# Altium PCB qav90.PcbDoc (part 5 of 7)
Units mm, origin at the board's own origin, x right, y up, seen from the top; angles counter-clockwise.
Board outline 90 x 90 mm, 3 copper layers (Top Layer, Mid-Layer 1, Bottom Layer); 214 components, 77 nets, 727 pads, 256 vias.
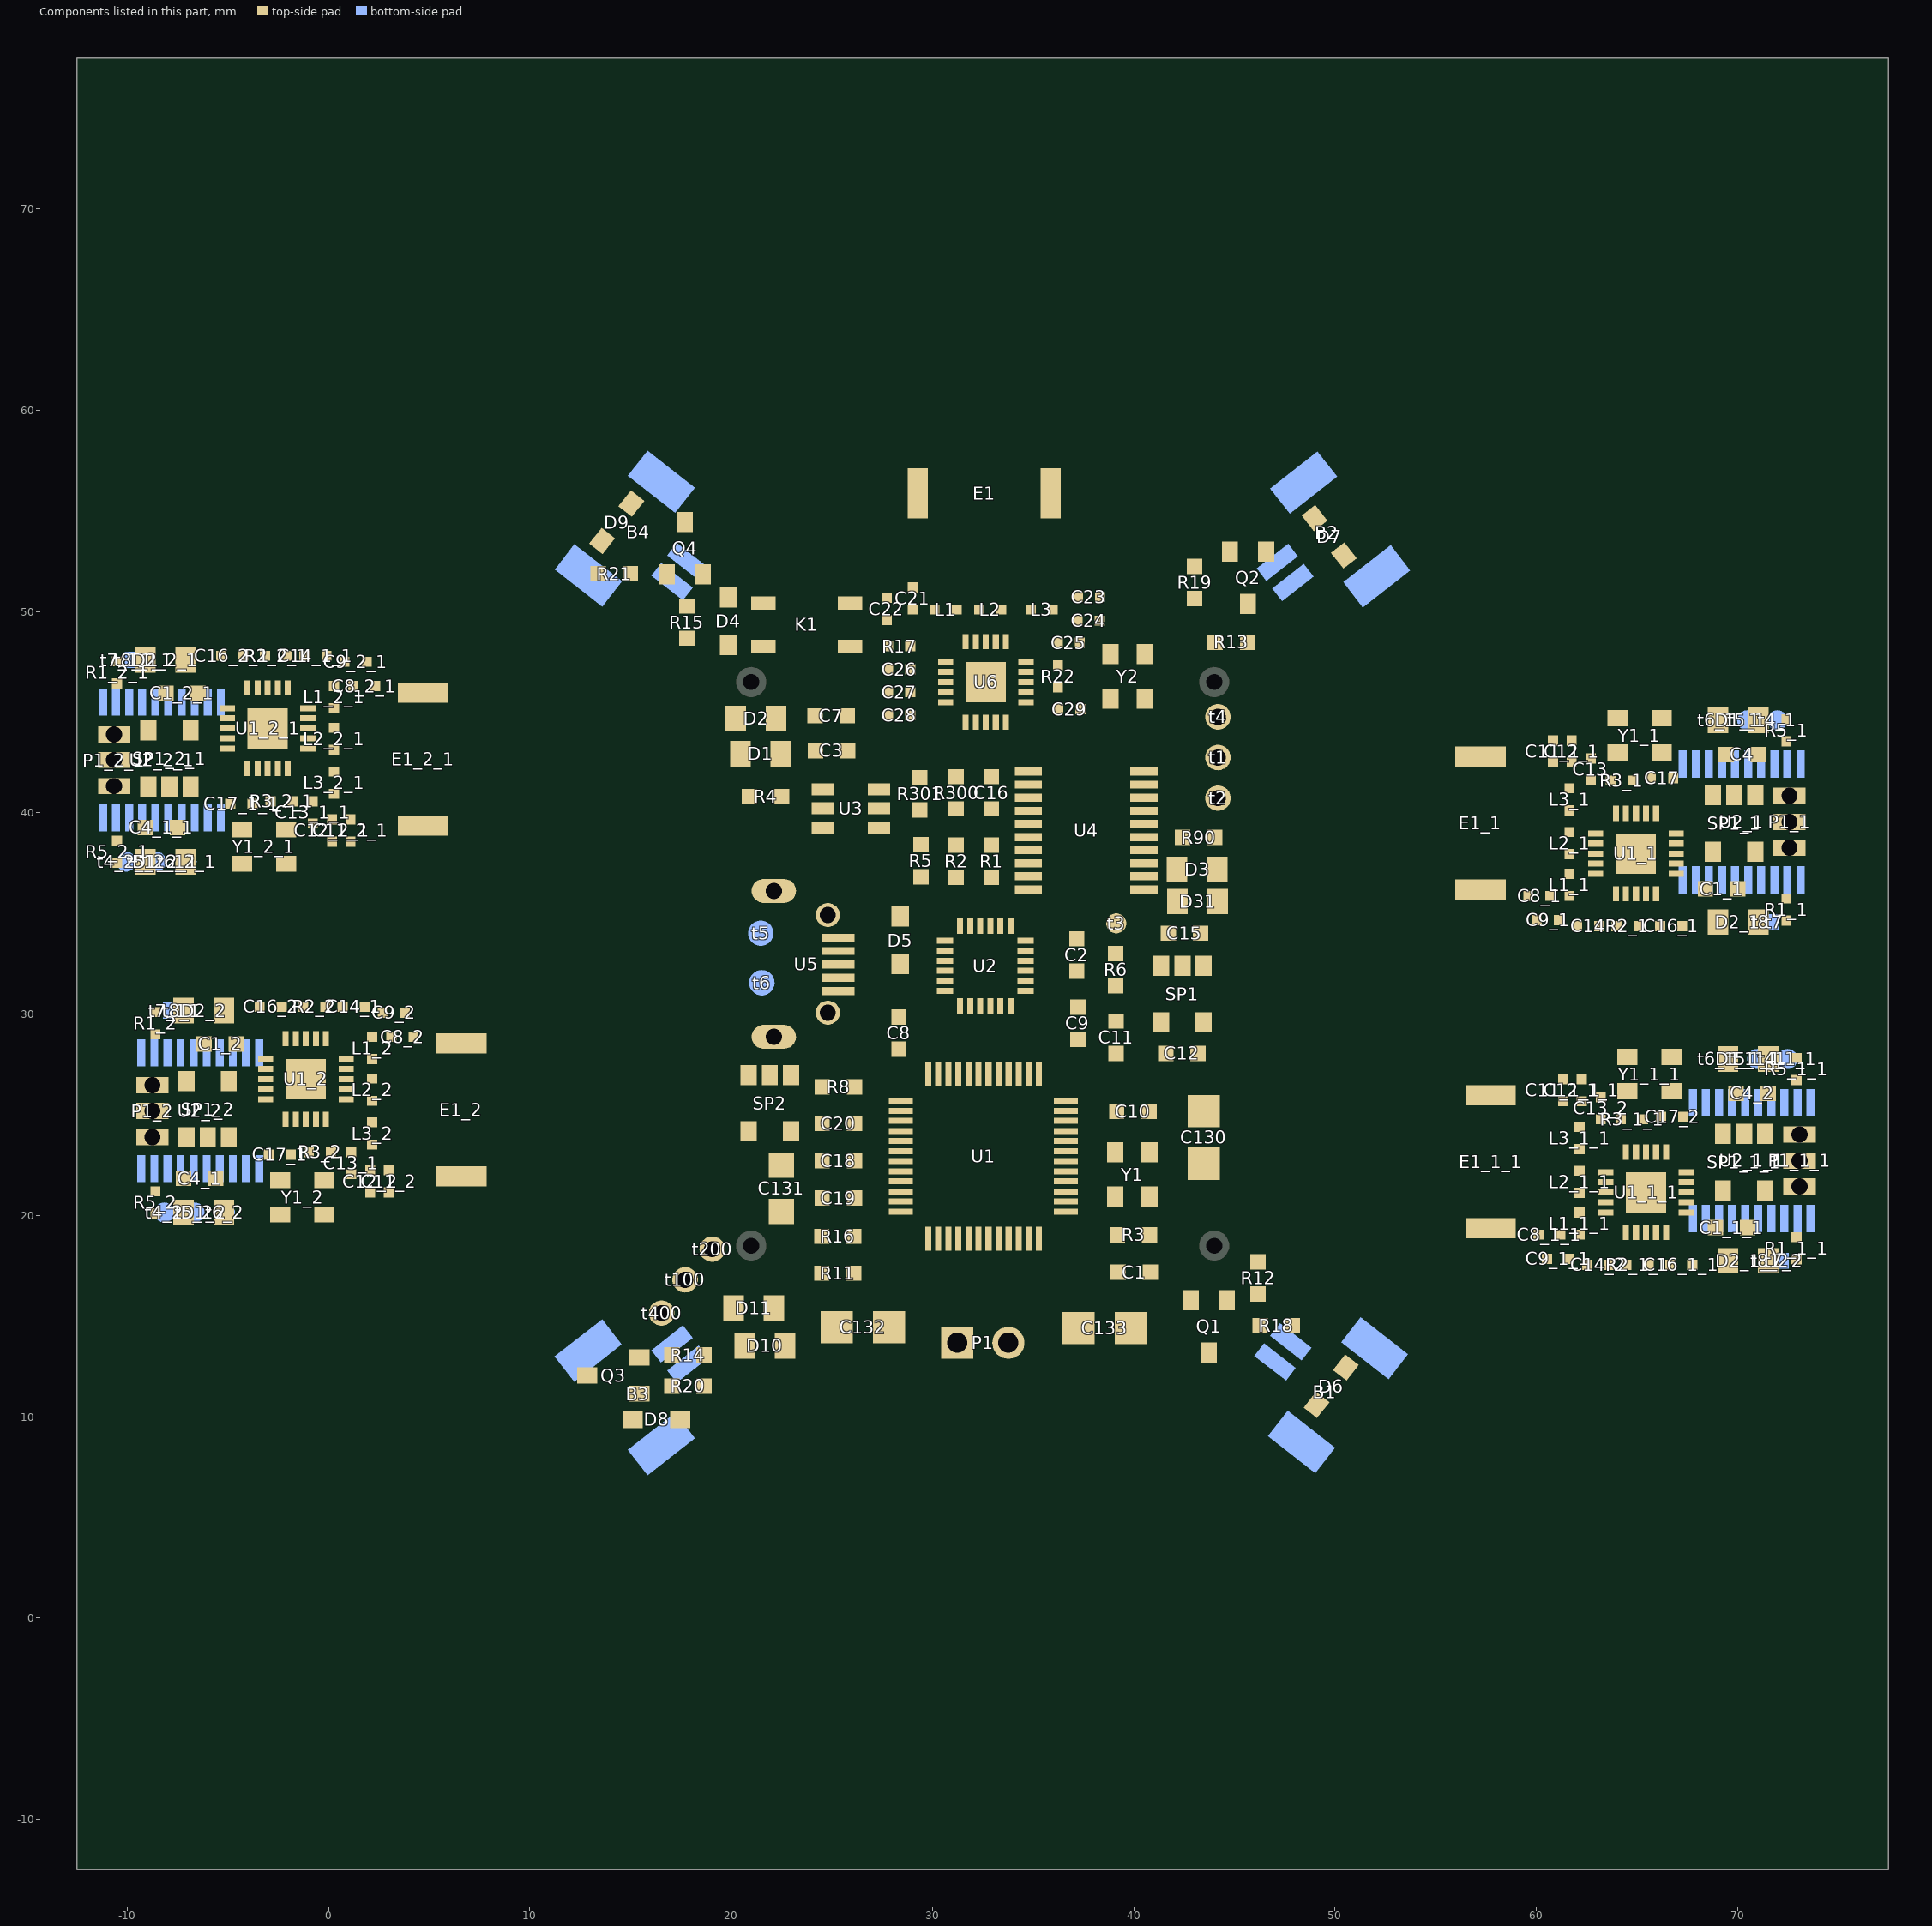
[diagram p5: the components of this part, seen from the top]

## Via types
v1: diameter 0.55, hole 0.25, Top Layer to Bottom Layer, tented both sides, 248 vias
v2: diameter 0.55, hole 0.25, Top Layer to Bottom Layer, 8 vias

## Nets (pads, with @x,y where several pads share a name; then routed paths per layer and width w, separated by ;. In a path a pad name is that pad's centre, name@x,y a point inside that pad or via, vN(x,y) a via of type N, cw(c..) or ccw(c..) an arc to the next point about the centre after c; other vN are vias at no path point) (continued)
copper on no net: (continued)
  Top Layer w0.254: 63.793,41.693 cw(c63.413,41.313) 63.95,41.313 ; 63.793,41.693 cw(c63.413,41.313) 63.95,41.313 ; 63.793,41.693 cw(c63.413,41.313) 63.95,41.313 ; 63.818,41.564 ccw(c64.434,41.378) 63.876,41.057 ; 63.818,41.564 ccw(c64.434,41.378) 63.876,41.057 ; 63.818,41.564 ccw(c64.434,41.378) 63.876,41.057 ; 63.903,24.775 cw(c63.903,24.478) 64.113,24.688 ; 63.903,24.775 ccw(c63.903,25.072) 64.113,24.862 ; 63.903,24.775 cw(c63.903,24.478) 64.113,24.688 ; 63.903,24.775 ccw(c63.903,25.072) 64.113,24.862 ; 63.903,24.775 cw(c63.903,24.478) 64.113,24.688 ; 63.903,24.775 ccw(c63.903,25.072) 64.113,24.862 ; 63.912,42.986 cw(c63.691,42.736) 63.98,42.568 ; 63.912,42.986 cw(c63.691,42.736) 63.98,42.568 ; 63.912,42.986 cw(c63.691,42.736) 63.98,42.568 ; 63.95,34.732 ccw(c64.332,34.732) 64.062,34.462 ; 63.95,34.732 ccw(c64.332,34.732) 64.062,34.462 ; 63.95,34.732 ccw(c64.332,34.732) 64.062,34.462 ; 64.093,37.475 ccw(c64.093,37.832) v1@64.345,37.58 ; 64.093,37.475 cw(c64.093,37.118) v1@64.345,37.37 ; 64.093,37.475 ccw(c64.093,37.832) v1@64.345,37.58 ; 64.093,37.475 cw(c64.093,37.118) v1@64.345,37.37 ; 64.093,37.475 ccw(c64.093,37.832) v1@64.345,37.58 ; 64.093,37.475 cw(c64.093,37.118) v1@64.345,37.37 ; 64.113,24.688 cw(c63.299,23.874) 64.45,23.874 ; 64.113,24.688 cw(c63.299,23.874) 64.45,23.874 ; 64.113,24.688 cw(c63.299,23.874) 64.45,23.874 ; 64.113,24.862 ccw(c63.903,25.072) 64.2,25.072 ; 64.113,24.862 ccw(c63.903,25.072) 64.2,25.072 ; 64.113,24.862 ccw(c63.903,25.072) 64.2,25.072 ; 64.2,24.973 cw(c65.627,24.973) 64.618,25.982 ; 64.2,24.973 cw(c65.627,24.973) 64.618,25.982 ; 64.2,24.973 cw(c65.627,24.973) 64.618,25.982 ; 64.2,25.072 ccw(c64.497,25.072) 64.287,24.862 ; 64.2,25.072 ccw(c64.497,25.072) 64.287,24.862 ; 64.2,25.072 ccw(c64.497,25.072) 64.287,24.862 ; 64.2,25.586 cw(c65.014,25.586) 64.438,26.162 ; 64.2,25.586 cw(c65.014,25.586) 64.438,26.162 ; 64.2,25.586 cw(c65.014,25.586) 64.438,26.162 ; 64.244,25.971 cw(c63.98,25.673) 64.325,25.474 ; 64.244,25.971 cw(c63.98,25.673) 64.325,25.474 ; 64.244,25.971 cw(c63.98,25.673) 64.325,25.474 ; 64.259,25.194 ccw(c64.715,25.072) 64.307,24.837 ; 64.259,25.194 ccw(c64.715,25.072) 64.307,24.837 ; 64.259,25.194 ccw(c64.715,25.072) 64.307,24.837 ; 64.293,24.868 cw(c63.913,24.488) 64.45,24.488 ; 64.293,24.868 cw(c63.913,24.488) 64.45,24.488 ; 64.293,24.868 cw(c63.913,24.488) 64.45,24.488 ; 64.318,24.739 ccw(c64.934,24.553) 64.376,24.232 ; 64.318,24.739 ccw(c64.934,24.553) 64.376,24.232 ; 64.318,24.739 ccw(c64.934,24.553) 64.376,24.232 ; v1@64.345,37.37 cw(c64.093,37.118) 64.45,37.118 ; v1@64.345,37.37 cw(c64.093,37.118) 64.45,37.118 ; v1@64.345,37.37 cw(c64.093,37.118) 64.45,37.118 ; v1@64.345,37.58 ccw(c64.093,37.832) 64.45,37.832 ; v1@64.345,37.58 ccw(c64.093,37.832) 64.45,37.832 ; v1@64.345,37.58 ccw(c64.093,37.832) 64.45,37.832 ; v1@64.345,38.345 cw(c64.093,38.093) 64.45,38.093 ; v1@64.345,38.345 cw(c64.093,38.093) 64.45,38.093 ; v1@64.345,38.345 cw(c64.093,38.093) 64.45,38.093 ; v1@64.356,38.615 ccw(c63.096,39.975) 64.95,39.975 ; v1@64.356,38.615 ccw(c63.096,39.975) 64.95,39.975 ; v1@64.356,38.615 ccw(c63.096,39.975) 64.95,39.975 ; 64.412,26.161 cw(c64.191,25.911) 64.48,25.743 ; 64.412,26.161 cw(c64.191,25.911) 64.48,25.743 ; 64.412,26.161 cw(c64.191,25.911) 64.48,25.743 ; v1@64.417,38.594 ccw(c64.278,39.203) 64.807,38.871 ; v1@64.417,38.594 ccw(c64.278,39.203) 64.807,38.871 ; v1@64.417,38.594 ccw(c64.278,39.203) 64.807,38.871 ; v1@64.417,38.594 ccw(c64.278,39.203) 64.807,38.871 ; v1@64.417,38.594 ccw(c64.278,39.203) 64.807,38.871 ; v1@64.417,38.594 ccw(c64.278,39.203) 64.807,38.871 ; 64.45,17.907 ccw(c64.832,17.907) 64.562,17.637 ; 64.45,17.907 ccw(c64.832,17.907) 64.562,17.637 ; 64.45,17.907 ccw(c64.832,17.907) 64.562,17.637 ; 64.45,37.118 cw(c64.807,37.118) v1@64.555,37.37 ; 64.45,37.118 cw(c64.807,37.118) v1@64.555,37.37 ; 64.45,37.118 cw(c64.807,37.118) v1@64.555,37.37 ; v1(64.45,37.475) v1(64.45,38.45) 64.95,38.45 ; 64.45,37.832 ccw(c64.807,37.832) v1@64.555,37.58 ; 64.45,37.832 ccw(c64.807,37.832) v1@64.555,37.58 ; 64.45,37.832 ccw(c64.807,37.832) v1@64.555,37.58 ; 64.45,38.093 cw(c64.807,38.093) v1@64.555,38.345 ; 64.45,38.093 cw(c64.807,38.093) v1@64.555,38.345 ; 64.45,38.093 cw(c64.807,38.093) v1@64.555,38.345 ; v1@64.529,38.429 ccw(c63.635,39.393) 64.95,39.393 ; v1@64.529,38.429 ccw(c63.635,39.393) 64.95,39.393 ; v1@64.529,38.429 ccw(c63.635,39.393) 64.95,39.393 ; v1@64.537,38.33 cw(c64.792,37.979) 64.905,38.398 ; v1@64.537,38.33 cw(c64.792,37.979) 64.905,38.398 ; v1@64.537,38.33 cw(c64.792,37.979) 64.905,38.398 ; v1@64.555,38.345 cw(c64.807,38.093) 64.807,38.45 ; v1@64.555,38.345 cw(c64.807,38.093) 64.807,38.45 ; v1@64.555,38.345 cw(c64.807,38.093) 64.807,38.45 ; v1@64.555,38.555 ccw(c64.807,38.807) 64.807,38.45 ; v1@64.555,38.555 ccw(c64.807,38.807) 64.807,38.45 ; v1@64.555,38.555 ccw(c64.807,38.807) 64.807,38.45 ; 64.59,41.39 ccw(c64.38,41.6) 64.677,41.6 ; 64.59,41.39 cw(c64.8,41.18) 64.8,41.477 ; 64.59,41.39 ccw(c64.38,41.6) 64.677,41.6 ; 64.59,41.39 cw(c64.8,41.18) 64.8,41.477 ; 64.59,41.39 ccw(c64.38,41.6) 64.677,41.6 ; 64.59,41.39 cw(c64.8,41.18) 64.8,41.477 ; 64.593,20.65 cw(c64.593,20.293) v1@64.845,20.545 ; 64.593,20.65 ccw(c64.593,21.007) v1@64.845,20.755 ; 64.593,20.65 cw(c64.593,20.293) v1@64.845,20.545 ; 64.593,20.65 ccw(c64.593,21.007) v1@64.845,20.755 ; 64.593,20.65 cw(c64.593,20.293) v1@64.845,20.545 ; 64.593,20.65 ccw(c64.593,21.007) v1@64.845,20.755 ; v1@64.595,38.481 cw(c65.505,38.677) 64.723,39.183 ; v1@64.595,38.481 cw(c65.505,38.677) 64.723,39.183 ; v1@64.595,38.481 cw(c65.505,38.677) 64.723,39.183 ; v1@64.595,38.481 cw(c65.505,38.677) 64.723,39.183 ; v1@64.595,38.481 cw(c65.505,38.677) 64.723,39.183 ; v1@64.595,38.481 cw(c65.505,38.677) 64.723,39.183 ; v1@64.598,38.457 cw(c64.957,38.473) 64.789,38.791 ; v1@64.598,38.457 cw(c64.957,38.473) 64.789,38.791 ; v1@64.598,38.457 cw(c64.957,38.473) 64.789,38.791 ; v1@64.598,38.457 cw(c64.957,38.473) 64.789,38.791 ; v1@64.712,38.45 cw(c64.712,37.837) v1@65.145,38.271 ; v1@64.712,38.45 cw(c64.712,37.837) v1@65.145,38.271 ; v1@64.712,38.45 cw(c64.712,37.837) v1@65.145,38.271 ; 64.713,41.687 ccw(c63.839,42.561) 65.075,42.561 ; 64.713,41.687 ccw(c63.839,42.561) 65.075,42.561 ; 64.713,41.687 ccw(c63.839,42.561) 65.075,42.561 ; 64.8,41.723 ccw(c64.8,42.02) 65.01,41.81 ; 64.8,41.723 ccw(c64.8,42.02) 65.01,41.81 ; 64.8,41.723 ccw(c64.8,42.02) 65.01,41.81 ; 64.82,41.721 ccw(c64.862,41.982) 65.09,41.85 ; 64.82,41.721 ccw(c64.862,41.982) 65.09,41.85 ; 64.82,41.721 ccw(c64.862,41.982) 65.09,41.85 ; v1@64.845,20.545 cw(c64.593,20.293) 64.95,20.293 ; v1@64.845,20.545 cw(c64.593,20.293) 64.95,20.293 ; v1@64.845,20.545 cw(c64.593,20.293) 64.95,20.293 ; v1@64.845,20.755 ccw(c64.593,21.007) 64.95,21.007 ; v1@64.845,20.755 ccw(c64.593,21.007) 64.95,21.007 ; v1@64.845,20.755 ccw(c64.593,21.007) 64.95,21.007 ; v1@64.845,21.52 cw(c64.593,21.268) 64.95,21.268 ; v1@64.845,21.52 cw(c64.593,21.268) 64.95,21.268 ; v1@64.845,21.52 cw(c64.593,21.268) 64.95,21.268 ; v1@64.845,35.23 ccw(c64.593,35.482) 64.95,35.482 ; v1@64.845,35.23 ccw(c64.593,35.482) 64.95,35.482 ; v1@64.845,35.23 ccw(c64.593,35.482) 64.95,35.482 ; v1@64.856,21.79 ccw(c63.596,23.15) 65.45,23.15 ; v1@64.856,21.79 ccw(c63.596,23.15) 65.45,23.15 ; v1@64.856,21.79 ccw(c63.596,23.15) 65.45,23.15 ; 64.887,41.513 cw(c65.157,41.243) 65.157,41.625 ; 64.887,41.513 cw(c65.157,41.243) 65.157,41.625 ; 64.887,41.513 cw(c65.157,41.243) 65.157,41.625 ; 64.893,41.507 ccw(c64.452,41.948) 65.075,41.948 ; 64.893,41.507 ccw(c64.452,41.948) 65.075,41.948 ; 64.893,41.507 ccw(c64.452,41.948) 65.075,41.948 ; v1@64.917,21.769 ccw(c64.778,22.378) 65.307,22.046 ; v1@64.917,21.769 ccw(c64.778,22.378) 65.307,22.046 ; v1@64.917,21.769 ccw(c64.778,22.378) 65.307,22.046 ; v1@64.917,21.769 ccw(c64.778,22.378) 65.307,22.046 ; v1@64.917,21.769 ccw(c64.778,22.378) 65.307,22.046 ; v1@64.917,21.769 ccw(c64.778,22.378) 65.307,22.046 ; 64.919,41.632 cw(c65.597,41.814) 64.989,42.165 ; 64.919,41.632 cw(c65.597,41.814) 64.989,42.165 ; 64.919,41.632 cw(c65.597,41.814) 64.989,42.165 ; 64.923,41.6 cw(c65.22,41.6) 65.01,41.81 ; 64.923,41.6 cw(c65.22,41.6) 65.01,41.81 ; 64.923,41.6 cw(c65.22,41.6) 65.01,41.81 ; 64.945,38.702 ccw(c65.253,38.879) v1@65.251,38.523 ; 64.945,38.702 ccw(c65.253,38.879) v1@65.251,38.523 ; 64.945,38.702 ccw(c65.253,38.879) v1@65.251,38.523 ; 64.95,20.293 cw(c65.307,20.293) v1@65.055,20.545 ; 64.95,20.293 cw(c65.307,20.293) v1@65.055,20.545 ; 64.95,20.293 cw(c65.307,20.293) v1@65.055,20.545 ; v1(64.95,20.65) v1(64.95,21.625) 65.45,21.625 ; 64.95,21.007 ccw(c65.307,21.007) v1@65.055,20.755 ; 64.95,21.007 ccw(c65.307,21.007) v1@65.055,20.755 ; 64.95,21.007 ccw(c65.307,21.007) v1@65.055,20.755 ; 64.95,21.268 cw(c65.307,21.268) v1@65.055,21.52 ; 64.95,21.268 cw(c65.307,21.268) v1@65.055,21.52 ; 64.95,21.268 cw(c65.307,21.268) v1@65.055,21.52 ; 64.95,35.482 ccw(c65.307,35.482) v1@65.055,35.23 ; 64.95,35.482 ccw(c65.307,35.482) v1@65.055,35.23 ; 64.95,35.482 ccw(c65.307,35.482) v1@65.055,35.23 ; 64.95,38.45 cw(c64.95,38.285) v1@65.108,38.333 ; 64.95,38.45 cw(c64.95,38.285) v1@65.108,38.333 ; 64.95,38.45 cw(c64.95,38.285) v1@65.108,38.333 ; 64.95,38.45 64.95,39.975 ; 64.95,38.843 ccw(c65.717,38.843) v1@65.175,38.3 ; 64.95,38.843 ccw(c65.717,38.843) v1@65.175,38.3 ; 64.95,38.843 ccw(c65.717,38.843) v1@65.175,38.3 ; 64.95,39.393 ccw(c66.265,39.393) v1@65.371,38.429 ; 64.95,39.393 ccw(c66.265,39.393) v1@65.371,38.429 ; 64.95,39.393 ccw(c66.265,39.393) v1@65.371,38.429 ; 64.95,39.456 ccw(c66.33,39.456) v1@65.354,38.48 ; 64.95,39.456 ccw(c66.33,39.456) v1@65.354,38.48 ; 64.95,39.456 ccw(c66.33,39.456) v1@65.354,38.48 ; 64.95,39.975 ccw(c66.804,39.975) 65.544,38.615 ; 64.95,39.975 ccw(c66.804,39.975) 65.544,38.615 ; 64.95,39.975 ccw(c66.804,39.975) 65.544,38.615 ; 64.973,38.661 ccw(c65.525,38.732) v1@65.185,38.291 ; 64.973,38.661 ccw(c65.525,38.732) v1@65.185,38.291 ; 64.973,38.661 ccw(c65.525,38.732) v1@65.185,38.291 ; 64.973,38.661 ccw(c65.525,38.732) v1@65.185,38.291 ; 64.973,38.661 ccw(c65.525,38.732) v1@65.185,38.291 ; 64.973,38.661 ccw(c65.525,38.732) v1@65.185,38.291 ; v1@65.029,21.604 ccw(c64.135,22.568) 65.45,22.568 ; v1@65.029,21.604 ccw(c64.135,22.568) 65.45,22.568 ; v1@65.029,21.604 ccw(c64.135,22.568) 65.45,22.568 ; v1@65.037,21.505 cw(c65.292,21.154) 65.405,21.573 ; v1@65.037,21.505 cw(c65.292,21.154) 65.405,21.573 ; v1@65.037,21.505 cw(c65.292,21.154) 65.405,21.573 ; 65.038,39.027 cw(c64.372,38.642) v1@65.108,38.418 ; 65.038,39.027 cw(c64.372,38.642) v1@65.108,38.418 ; 65.038,39.027 cw(c64.372,38.642) v1@65.108,38.418 ; 65.042,38.952 cw(c64.507,38.615) v1@65.109,38.421 ; 65.042,38.952 cw(c64.507,38.615) v1@65.109,38.421 ; 65.042,38.952 cw(c64.507,38.615) v1@65.109,38.421 ; 65.042,38.952 cw(c64.507,38.615) v1@65.109,38.421 ; 65.042,38.952 cw(c64.507,38.615) v1@65.109,38.421 ; 65.042,38.952 cw(c64.507,38.615) v1@65.109,38.421 ; v1@65.055,21.52 cw(c65.307,21.268) 65.307,21.625 ; v1@65.055,21.52 cw(c65.307,21.268) 65.307,21.625 ; v1@65.055,21.52 cw(c65.307,21.268) 65.307,21.625 ; v1@65.055,21.73 ccw(c65.307,21.982) 65.307,21.625 ; v1@65.055,21.73 ccw(c65.307,21.982) 65.307,21.625 ; v1@65.055,21.73 ccw(c65.307,21.982) 65.307,21.625 ; 65.09,24.565 cw(c65.3,24.355) 65.3,24.652 ; 65.09,24.565 ccw(c64.88,24.775) 65.177,24.775 ; 65.09,24.565 cw(c65.3,24.355) 65.3,24.652 ; 65.09,24.565 ccw(c64.88,24.775) 65.177,24.775 ; 65.09,24.565 cw(c65.3,24.355) 65.3,24.652 ; 65.09,24.565 ccw(c64.88,24.775) 65.177,24.775 ; v1@65.095,21.656 cw(c66.005,21.852) 65.223,22.358 ; v1@65.095,21.656 cw(c66.005,21.852) 65.223,22.358 ; v1@65.095,21.656 cw(c66.005,21.852) 65.223,22.358 ; v1@65.095,21.656 cw(c66.005,21.852) 65.223,22.358 ; v1@65.095,21.656 cw(c66.005,21.852) 65.223,22.358 ; v1@65.095,21.656 cw(c66.005,21.852) 65.223,22.358 ; v1@65.098,21.632 cw(c65.457,21.648) 65.289,21.966 ; v1@65.098,21.632 cw(c65.457,21.648) 65.289,21.966 ; v1@65.098,21.632 cw(c65.457,21.648) 65.289,21.966 ; v1@65.098,21.632 cw(c65.457,21.648) 65.289,21.966 ; v1@65.135,38.469 ccw(c64.687,38.836) 65.167,39.159 ; v1@65.135,38.469 ccw(c64.687,38.836) 65.167,39.159 ; v1@65.135,38.469 ccw(c64.687,38.836) 65.167,39.159 ; v1@65.135,38.469 ccw(c64.687,38.836) 65.167,39.159 ; v1@65.135,38.469 ccw(c64.687,38.836) 65.167,39.159 ; v1@65.135,38.469 ccw(c64.687,38.836) 65.167,39.159 ; 65.162,41.625 ccw(c65.162,42.263) 65.613,41.812 ; 65.162,41.625 ccw(c65.162,42.263) 65.613,41.812 ; 65.162,41.625 ccw(c65.162,42.263) 65.613,41.812 ; v1@65.212,21.625 cw(c65.212,21.012) v1@65.645,21.446 ; v1@65.212,21.625 cw(c65.212,21.012) v1@65.645,21.446 ; v1@65.212,21.625 cw(c65.212,21.012) v1@65.645,21.446 ; 65.213,24.862 ccw(c64.339,25.736) 65.575,25.736 ; 65.213,24.862 ccw(c64.339,25.736) 65.575,25.736 ; 65.213,24.862 ccw(c64.339,25.736) 65.575,25.736 ; 65.3,24.898 ccw(c65.3,25.195) 65.51,24.985 ; 65.3,24.898 ccw(c65.3,25.195) 65.51,24.985 ; 65.3,24.898 ccw(c65.3,25.195) 65.51,24.985 ; 65.32,24.896 ccw(c65.362,25.157) 65.59,25.025 ; 65.32,24.896 ccw(c65.362,25.157) 65.59,25.025 ; 65.32,24.896 ccw(c65.362,25.157) 65.59,25.025 ; v1@65.332,38.308 ccw(c64.963,38.61) 65.358,38.876 ; v1@65.332,38.308 ccw(c64.963,38.61) 65.358,38.876 ; v1@65.332,38.308 ccw(c64.963,38.61) 65.358,38.876 ; v1@65.332,38.308 ccw(c64.963,38.61) 65.358,38.876 ; v1@65.332,38.308 ccw(c64.963,38.61) 65.358,38.876 ; v1@65.332,38.308 ccw(c64.963,38.61) 65.358,38.876 ; v1@65.345,18.405 ccw(c65.093,18.657) 65.45,18.657 ; v1@65.345,18.405 ccw(c65.093,18.657) 65.45,18.657 ; v1@65.345,18.405 ccw(c65.093,18.657) 65.45,18.657 ; v1@65.345,40.795 cw(c65.093,40.543) 65.45,40.543 ; v1@65.345,40.795 cw(c65.093,40.543) 65.45,40.543 ; v1@65.345,40.795 cw(c65.093,40.543) 65.45,40.543 ; 65.386,41.681 cw(c65.474,41.528) 65.607,41.644 ; 65.386,41.681 cw(c65.474,41.528) 65.607,41.644 ; 65.386,41.681 cw(c65.474,41.528) 65.607,41.644 ; 65.387,24.688 cw(c65.657,24.418) 65.657,24.8 ; 65.387,24.688 cw(c65.657,24.418) 65.657,24.8 ; 65.387,24.688 cw(c65.657,24.418) 65.657,24.8 ; 65.393,24.682 ccw(c64.952,25.123) 65.575,25.123 ; 65.393,24.682 ccw(c64.952,25.123) 65.575,25.123 ; 65.393,24.682 ccw(c64.952,25.123) 65.575,25.123 ; 65.419,24.807 cw(c66.097,24.989) 65.489,25.34 ; 65.419,24.807 cw(c66.097,24.989) 65.489,25.34 ; 65.419,24.807 cw(c66.097,24.989) 65.489,25.34 ; 65.423,24.775 cw(c65.72,24.775) 65.51,24.985 ; 65.423,24.775 cw(c65.72,24.775) 65.51,24.985 ; 65.423,24.775 cw(c65.72,24.775) 65.51,24.985 ; 65.434,35.734 cw(c65.263,35.563) 65.504,35.563 ; 65.434,35.734 cw(c65.263,35.563) 65.504,35.563 ; 65.434,35.734 cw(c65.263,35.563) 65.504,35.563 ; 65.445,21.877 ccw(c65.753,22.054) v1@65.751,21.698 ; 65.445,21.877 ccw(c65.753,22.054) v1@65.751,21.698 ; 65.445,21.877 ccw(c65.753,22.054) v1@65.751,21.698 ; 65.45,18.657 ccw(c65.807,18.657) v1@65.555,18.405 ; 65.45,18.657 ccw(c65.807,18.657) v1@65.555,18.405 ; 65.45,18.657 ccw(c65.807,18.657) v1@65.555,18.405 ; 65.45,21.625 cw(c65.45,21.46) v1@65.608,21.508 ; 65.45,21.625 cw(c65.45,21.46) v1@65.608,21.508 ; 65.45,21.625 cw(c65.45,21.46) v1@65.608,21.508 ; 65.45,21.625 65.45,23.15 ; 65.45,22.018 ccw(c66.217,22.018) v1@65.675,21.475 ; 65.45,22.018 ccw(c66.217,22.018) v1@65.675,21.475 ; 65.45,22.018 ccw(c66.217,22.018) v1@65.675,21.475 ; 65.45,22.568 ccw(c66.765,22.568) v1@65.871,21.604 ; 65.45,22.568 ccw(c66.765,22.568) v1@65.871,21.604 ; 65.45,22.568 ccw(c66.765,22.568) v1@65.871,21.604 ; 65.45,22.631 ccw(c66.83,22.631) v1@65.854,21.655 ; 65.45,22.631 ccw(c66.83,22.631) v1@65.854,21.655 ; 65.45,22.631 ccw(c66.83,22.631) v1@65.854,21.655 ; 65.45,23.15 ccw(c67.304,23.15) 66.044,21.79 ; 65.45,23.15 ccw(c67.304,23.15) 66.044,21.79 ; 65.45,23.15 ccw(c67.304,23.15) 66.044,21.79 ; 65.45,40.543 cw(c65.807,40.543) v1@65.555,40.795 ; 65.45,40.543 cw(c65.807,40.543) v1@65.555,40.795 ; 65.45,40.543 cw(c65.807,40.543) v1@65.555,40.795 ; 65.473,21.836 ccw(c66.025,21.907) v1@65.685,21.466 ; 65.473,21.836 ccw(c66.025,21.907) v1@65.685,21.466 ; 65.473,21.836 ccw(c66.025,21.907) v1@65.685,21.466 ; 65.473,21.836 ccw(c66.025,21.907) v1@65.685,21.466 ; 65.473,21.836 ccw(c66.025,21.907) v1@65.685,21.466 ; 65.473,21.836 ccw(c66.025,21.907) v1@65.685,21.466 ; 65.538,22.202 cw(c64.872,21.817) v1@65.608,21.593 ; 65.538,22.202 cw(c64.872,21.817) v1@65.608,21.593 ; 65.538,22.202 cw(c64.872,21.817) v1@65.608,21.593 ; 65.542,22.127 cw(c65.007,21.79) v1@65.609,21.596 ; 65.542,22.127 cw(c65.007,21.79) v1@65.609,21.596 ; 65.542,22.127 cw(c65.007,21.79) v1@65.609,21.596 ; 65.542,22.127 cw(c65.007,21.79) v1@65.609,21.596 ; 65.542,22.127 cw(c65.007,21.79) v1@65.609,21.596 ; 65.542,22.127 cw(c65.007,21.79) v1@65.609,21.596 ; 65.588,44.063 ccw(c64.952,44.7) 65.852,44.7 ; 65.588,44.063 ccw(c64.952,44.7) 65.852,44.7 ; 65.588,44.063 ccw(c64.952,44.7) 65.852,44.7 ; v1@65.635,21.644 ccw(c65.187,22.011) 65.667,22.334 ; v1@65.635,21.644 ccw(c65.187,22.011) 65.667,22.334 ; v1@65.635,21.644 ccw(c65.187,22.011) 65.667,22.334 ; v1@65.635,21.644 ccw(c65.187,22.011) 65.667,22.334 ; v1@65.635,21.644 ccw(c65.187,22.011) 65.667,22.334 ; v1@65.635,21.644 ccw(c65.187,22.011) 65.667,22.334 ; 65.662,24.8 ccw(c65.662,25.438) 66.113,24.987 ; 65.662,24.8 ccw(c65.662,25.438) 66.113,24.987 ; 65.662,24.8 ccw(c65.662,25.438) 66.113,24.987 ; 65.735,44.263 cw(c66.321,44.106) 66.131,44.682 ; 65.735,44.263 cw(c66.321,44.106) 66.131,44.682 ; 65.735,44.263 cw(c66.321,44.106) 66.131,44.682 ; 65.83,44.305 cw(c66.125,44.009) 66.125,44.427 ; 65.83,44.305 cw(c66.125,44.009) 66.125,44.427 ; 65.83,44.305 cw(c66.125,44.009) 66.125,44.427 ; v1@65.832,21.483 ccw(c65.463,21.785) 65.858,22.051 ; v1@65.832,21.483 ccw(c65.463,21.785) 65.858,22.051 ; v1@65.832,21.483 ccw(c65.463,21.785) 65.858,22.051 ; v1@65.832,21.483 ccw(c65.463,21.785) 65.858,22.051 ; v1@65.832,21.483 ccw(c65.463,21.785) 65.858,22.051 ; v1@65.832,21.483 ccw(c65.463,21.785) 65.858,22.051 ; v1@65.845,23.97 cw(c65.593,23.718) 65.95,23.718 ; v1@65.845,23.97 cw(c65.593,23.718) 65.95,23.718 ; v1@65.845,23.97 cw(c65.593,23.718) 65.95,23.718 ; 65.886,24.856 cw(c65.974,24.703) 66.107,24.819 ; 65.886,24.856 cw(c65.974,24.703) 66.107,24.819 ; 65.886,24.856 cw(c65.974,24.703) 66.107,24.819 ; 65.905,34.67 cw(c65.609,34.375) 66.027,34.375 ; 65.905,34.67 cw(c65.609,34.375) 66.027,34.375 ; 65.905,34.67 cw(c65.609,34.375) 66.027,34.375 ; 65.934,18.909 cw(c65.763,18.738) 66.004,18.738 ; 65.934,18.909 cw(c65.763,18.738) 66.004,18.738 ; 65.934,18.909 cw(c65.763,18.738) 66.004,18.738 ; 65.95,23.718 cw(c66.307,23.718) v1@66.055,23.97 ; 65.95,23.718 cw(c66.307,23.718) v1@66.055,23.97 ; 65.95,23.718 cw(c66.307,23.718) v1@66.055,23.97 ; 65.95,40.223 ccw(c65.95,40.822) 66.373,40.398 ; 65.95,40.223 ccw(c65.95,40.822) 66.373,40.398 ; 65.95,40.223 ccw(c65.95,40.822) 66.373,40.398 ; 66.088,27.238 ccw(c65.452,27.875) 66.352,27.875 ; 66.088,27.238 ccw(c65.452,27.875) 66.352,27.875 ; 66.088,27.238 ccw(c65.452,27.875) 66.352,27.875 ; 66.235,27.438 cw(c66.821,27.281) 66.631,27.857 ; 66.235,27.438 cw(c66.821,27.281) 66.631,27.857 ; 66.235,27.438 cw(c66.821,27.281) 66.631,27.857 ; v1@66.32,40.821 cw(c66.127,40.628) 66.4,40.628 ; v1@66.32,40.821 cw(c66.127,40.628) 66.4,40.628 ; v1@66.32,40.821 cw(c66.127,40.628) 66.4,40.628 ; 66.33,27.48 cw(c66.625,27.184) 66.625,27.602 ; 66.33,27.48 cw(c66.625,27.184) 66.625,27.602 ; 66.33,27.48 cw(c66.625,27.184) 66.625,27.602 ; 66.4,40.509 cw(c66.841,40.509) v1@66.529,40.821 ; 66.4,40.509 cw(c66.841,40.509) v1@66.529,40.821 ; 66.4,40.509 cw(c66.841,40.509) v1@66.529,40.821 ; 66.405,17.845 cw(c66.109,17.55) 66.527,17.55 ; 66.405,17.845 cw(c66.109,17.55) 66.527,17.55 ; 66.405,17.845 cw(c66.109,17.55) 66.527,17.55 ; 66.45,23.398 ccw(c66.45,23.997) 66.873,23.573 ; 66.45,23.398 ccw(c66.45,23.997) 66.873,23.573 ; 66.45,23.398 ccw(c66.45,23.997) 66.873,23.573 ; v1@66.745,36.13 ccw(c66.251,36.624) 66.95,36.624 ; v1@66.745,36.13 ccw(c66.251,36.624) 66.95,36.624 ; v1@66.745,36.13 ccw(c66.251,36.624) 66.95,36.624 ; v1@66.82,23.996 cw(c66.627,23.803) 66.9,23.803 ; v1@66.82,23.996 cw(c66.627,23.803) 66.9,23.803 ; v1@66.82,23.996 cw(c66.627,23.803) 66.9,23.803 ; 66.885,36.371 ccw(c67.033,36.286) v1@66.935,36.146 ; 66.885,36.371 ccw(c67.033,36.286) v1@66.935,36.146 ; 66.885,36.371 ccw(c67.033,36.286) v1@66.935,36.146 ; 66.9,23.684 cw(c67.341,23.684) v1@67.029,23.996 ; 66.9,23.684 cw(c67.341,23.684) v1@67.029,23.996 ; 66.9,23.684 cw(c67.341,23.684) v1@67.029,23.996 ; v1@67.245,19.305 ccw(c66.751,19.799) 67.45,19.799 ; v1@67.245,19.305 ccw(c66.751,19.799) 67.45,19.799 ; v1@67.245,19.305 ccw(c66.751,19.799) 67.45,19.799 ; 67.347,41.213 cw(c67.925,40.635) v1@67.925,41.452 ; 67.347,41.213 cw(c67.925,40.635) v1@67.925,41.452 ; 67.347,41.213 cw(c67.925,40.635) v1@67.925,41.452 ; 67.385,19.546 ccw(c67.533,19.461) v1@67.435,19.321 ; 67.385,19.546 ccw(c67.533,19.461) v1@67.435,19.321 ; 67.385,19.546 ccw(c67.533,19.461) v1@67.435,19.321 ; v1@67.395,39.745 cw(c66.891,39.241) 67.604,39.241 ; v1@67.395,39.745 cw(c66.891,39.241) 67.604,39.241 ; v1@67.395,39.745 cw(c66.891,39.241) 67.604,39.241 ; v1@67.4,35.598 ccw(c67.4,35.895) 67.61,35.685 ; v1@67.4,35.598 ccw(c67.4,35.895) 67.61,35.685 ; v1@67.4,35.598 ccw(c67.4,35.895) 67.61,35.685 ; 67.539,39.497 cw(c67.694,39.586) v1@67.588,39.731 ; 67.539,39.497 cw(c67.694,39.586) v1@67.588,39.731 ; 67.539,39.497 cw(c67.694,39.586) v1@67.588,39.731 ; v1@67.548,35.45 cw(c67.966,35.45) 67.67,35.745 ; v1@67.548,35.45 cw(c67.966,35.45) 67.67,35.745 ; v1@67.548,35.45 cw(c67.966,35.45) 67.67,35.745 ; v1@67.745,40.545 cw(c66.95,39.75) 68.075,39.75 ; v1@67.745,40.545 cw(c66.95,39.75) 68.075,39.75 ; v1@67.745,40.545 cw(c66.95,39.75) 68.075,39.75 ; 67.847,24.388 cw(c68.425,23.81) v1@68.425,24.627 ; 67.847,24.388 cw(c68.425,23.81) v1@68.425,24.627 ; 67.847,24.388 cw(c68.425,23.81) v1@68.425,24.627 ; v1@67.875,45 cw(c67.875,44.043) 68.698,44.532 ; v1@67.875,45 cw(c67.875,44.043) 68.698,44.532 ; v1@67.875,45 cw(c67.875,44.043) 68.698,44.532 ; v1@67.895,22.92 cw(c67.391,22.416) 68.104,22.416 ; v1@67.895,22.92 cw(c67.391,22.416) 68.104,22.416 ; v1@67.895,22.92 cw(c67.391,22.416) 68.104,22.416 ; v1@67.9,18.773 ccw(c67.9,19.07) 68.11,18.86 ; v1@67.9,18.773 ccw(c67.9,19.07) 68.11,18.86 ; v1@67.9,18.773 ccw(c67.9,19.07) 68.11,18.86 ; v1@67.903,40.512 cw(c67.961,40.361) 68.075,40.475 ; v1@67.903,40.512 cw(c67.961,40.361) 68.075,40.475 ; v1@67.903,40.512 cw(c67.961,40.361) 68.075,40.475 ; v1@67.925,40.725 cw(c67.563,40.363) 68.075,40.363 ; v1@67.925,40.725 cw(c67.563,40.363) 68.075,40.363 ; v1@67.925,40.725 cw(c67.563,40.363) 68.075,40.363 ; v1@67.949,44.872 cw(c68.128,44.562) 68.22,44.908 ; v1@67.949,44.872 cw(c68.128,44.562) 68.22,44.908 ; v1@67.949,44.872 cw(c68.128,44.562) 68.22,44.908 ; v1@67.949,44.872 cw(c68.128,44.562) 68.22,44.908 ; v1@67.949,44.872 cw(c68.128,44.562) 68.22,44.908 ; v1@67.949,44.872 cw(c68.128,44.562) 68.22,44.908 ; v1@67.98,44.895 cw(c68.232,44.643) 68.232,45 ; v1@67.98,44.895 cw(c68.232,44.643) 68.232,45 ; v1@67.98,44.895 cw(c68.232,44.643) 68.232,45 ; v1@67.98,45.105 ccw(c68.232,45.357) 68.232,45 ; v1@67.98,45.105 ccw(c68.232,45.357) 68.232,45 ; v1@67.98,45.105 ccw(c68.232,45.357) 68.232,45 ; v1@67.982,40.583 ccw(c68.425,40.36) 67.995,40.112 ; v1@67.982,40.583 ccw(c68.425,40.36) 67.995,40.112 ; v1@67.982,40.583 ccw(c68.425,40.36) 67.995,40.112 ; v1@68.003,45.074 ccw(c68.313,45.253) 68.22,44.908 ; v1@68.003,45.074 ccw(c68.313,45.253) 68.22,44.908 ; v1@68.003,45.074 ccw(c68.313,45.253) 68.22,44.908 ; v1@68.003,45.074 ccw(c68.313,45.253) 68.22,44.908 ; v1@68.003,45.074 ccw(c68.313,45.253) 68.22,44.908 ; v1@68.003,45.074 ccw(c68.313,45.253) 68.22,44.908 ; 68.039,22.672 cw(c68.194,22.761) v1@68.088,22.906 ; 68.039,22.672 cw(c68.194,22.761) v1@68.088,22.906 ; 68.039,22.672 cw(c68.194,22.761) v1@68.088,22.906 ; v1@68.048,18.625 cw(c68.466,18.625) 68.17,18.92 ; v1@68.048,18.625 cw(c68.466,18.625) 68.17,18.92 ; v1@68.048,18.625 cw(c68.466,18.625) 68.17,18.92 ; v1@68.245,23.72 cw(c67.45,22.925) 68.575,22.925 ; v1@68.245,23.72 cw(c67.45,22.925) 68.575,22.925 ; v1@68.245,23.72 cw(c67.45,22.925) 68.575,22.925 ; 68.322,45 cw(c68.322,44.309) 68.916,44.662 ; 68.322,45 cw(c68.322,44.309) 68.916,44.662 ; 68.322,45 cw(c68.322,44.309) 68.916,44.662 ; v1@68.375,28.175 cw(c68.375,27.218) 69.198,27.707 ; v1@68.375,28.175 cw(c68.375,27.218) 69.198,27.707 ; v1@68.375,28.175 cw(c68.375,27.218) 69.198,27.707 ; v1@68.403,23.687 cw(c68.461,23.536) 68.575,23.65 ; v1@68.403,23.687 cw(c68.461,23.536) 68.575,23.65 ; v1@68.403,23.687 cw(c68.461,23.536) 68.575,23.65 ; v1@68.425,23.9 cw(c68.063,23.538) 68.575,23.538 ; v1@68.425,23.9 cw(c68.063,23.538) 68.575,23.538 ; v1@68.425,23.9 cw(c68.063,23.538) 68.575,23.538 ; v1@68.449,28.047 cw(c68.628,27.737) 68.72,28.083 ; v1@68.449,28.047 cw(c68.628,27.737) 68.72,28.083 ; v1@68.449,28.047 cw(c68.628,27.737) 68.72,28.083 ; v1@68.449,28.047 cw(c68.628,27.737) 68.72,28.083 ; v1@68.449,28.047 cw(c68.628,27.737) 68.72,28.083 ; v1@68.449,28.047 cw(c68.628,27.737) 68.72,28.083 ; v1@68.48,28.07 cw(c68.732,27.818) 68.732,28.175 ; v1@68.48,28.07 cw(c68.732,27.818) 68.732,28.175 ; v1@68.48,28.07 cw(c68.732,27.818) 68.732,28.175 ; v1@68.48,28.28 ccw(c68.732,28.532) 68.732,28.175 ; v1@68.48,28.28 ccw(c68.732,28.532) 68.732,28.175 ; v1@68.48,28.28 ccw(c68.732,28.532) 68.732,28.175 ; v1@68.482,23.758 ccw(c68.925,23.535) 68.495,23.287 ; v1@68.482,23.758 ccw(c68.925,23.535) 68.495,23.287 ; v1@68.482,23.758 ccw(c68.925,23.535) 68.495,23.287 ; v1@68.503,28.249 ccw(c68.813,28.428) 68.72,28.083 ; v1@68.503,28.249 ccw(c68.813,28.428) 68.72,28.083 ; v1@68.503,28.249 ccw(c68.813,28.428) 68.72,28.083 ; v1@68.503,28.249 ccw(c68.813,28.428) 68.72,28.083 ; v1@68.503,28.249 ccw(c68.813,28.428) 68.72,28.083 ; v1@68.503,28.249 ccw(c68.813,28.428) 68.72,28.083 ; 68.822,28.175 cw(c68.822,27.484) 69.416,27.837 ; 68.822,28.175 cw(c68.822,27.484) 69.416,27.837 ; 68.822,28.175 cw(c68.822,27.484) 69.416,27.837 ; 68.904,34.741 cw(c69.524,34.543) 69.356,35.172 ; 68.904,34.741 cw(c69.524,34.543) 69.356,35.172 ; 68.904,34.741 cw(c69.524,34.543) 69.356,35.172 ; 69.025,34.829 ccw(c69.025,35.442) 69.459,35.009 ; 69.025,34.829 ccw(c69.025,35.442) 69.459,35.009 ; 69.025,34.829 ccw(c69.025,35.442) 69.459,35.009 ; 69.025,35.083 ccw(c69.025,36.309) 69.892,35.442 ; 69.025,35.083 ccw(c69.025,36.309) 69.892,35.442 ; 69.025,35.083 ccw(c69.025,36.309) 69.892,35.442 ; 69.404,17.916 cw(c70.024,17.718) 69.856,18.347 ; 69.404,17.916 cw(c70.024,17.718) 69.856,18.347 ; 69.404,17.916 cw(c70.024,17.718) 69.856,18.347 ; 69.406,34.702 cw(c70.019,34.702) 69.586,35.136 ; 69.406,34.702 cw(c70.019,34.702) 69.586,35.136 ; 69.406,34.702 cw(c70.019,34.702) 69.586,35.136 ; 69.525,18.004 ccw(c69.525,18.617) 69.959,18.184 ; 69.525,18.004 ccw(c69.525,18.617) 69.959,18.184 ; 69.525,18.004 ccw(c69.525,18.617) 69.959,18.184 ; 69.525,18.258 ccw(c69.525,19.484) 70.392,18.617 ; 69.525,18.258 ccw(c69.525,19.484) 70.392,18.617 ; 69.525,18.258 ccw(c69.525,19.484) 70.392,18.617 ; 69.906,17.877 cw(c70.519,17.877) 70.086,18.311 ; 69.906,17.877 cw(c70.519,17.877) 70.086,18.311 ; 69.906,17.877 cw(c70.519,17.877) 70.086,18.311 ; 71.294,34.433 cw(c71.819,33.908) 71.819,34.65 ; 71.294,34.433 cw(c71.819,33.908) 71.819,34.65 ; 71.294,34.433 cw(c71.819,33.908) 71.819,34.65 ; 71.294,34.971 ccw(c72.07,35.747) 72.07,34.65 ; 71.294,34.971 ccw(c72.07,35.747) 72.07,34.65 ; 71.294,34.971 ccw(c72.07,35.747) 72.07,34.65 ; 71.294,44.331 cw(c72.065,43.559) 72.065,44.65 ; 71.294,44.331 cw(c72.065,43.559) 72.065,44.65 ; 71.294,44.331 cw(c72.065,43.559) 72.065,44.65 ; 71.294,44.869 ccw(c71.824,45.399) 71.824,44.65 ; 71.294,44.869 ccw(c71.824,45.399) 71.824,44.65 ; 71.294,44.869 ccw(c71.824,45.399) 71.824,44.65 ; 71.794,17.608 cw(c72.319,17.083) 72.319,17.825 ; 71.794,17.608 cw(c72.319,17.083) 72.319,17.825 ; 71.794,17.608 cw(c72.319,17.083) 72.319,17.825 ; 71.794,18.146 ccw(c72.57,18.922) 72.57,17.825 ; 71.794,18.146 ccw(c72.57,18.922) 72.57,17.825 ; 71.794,18.146 ccw(c72.57,18.922) 72.57,17.825 ; 71.794,27.506 cw(c72.566,26.734) 72.566,27.825 ; 71.794,27.506 cw(c72.566,26.734) 72.566,27.825 ; 71.794,27.506 cw(c72.566,26.734) 72.566,27.825 ; 71.794,28.044 ccw(c72.324,28.574) 72.324,27.825 ; 71.794,28.044 ccw(c72.324,28.574) 72.324,27.825 ; 71.794,28.044 ccw(c72.324,28.574) 72.324,27.825 ; 72.128,34.65 ccw(c72.128,34.947) 72.338,34.737 ; 72.128,34.65 cw(c72.128,34.353) 72.338,34.563 ; 72.128,34.65 ccw(c72.128,34.947) 72.338,34.737 ; 72.128,34.65 cw(c72.128,34.353) 72.338,34.563 ; 72.128,34.65 ccw(c72.128,34.947) 72.338,34.737 ; 72.128,34.65 cw(c72.128,34.353) 72.338,34.563 ; 72.128,44.65 ccw(c72.128,44.947) 72.338,44.737 ; 72.128,44.65 cw(c72.128,44.353) 72.338,44.563 ; 72.128,44.65 ccw(c72.128,44.947) 72.338,44.737 ; 72.128,44.65 cw(c72.128,44.353) 72.338,44.563 ; 72.128,44.65 ccw(c72.128,44.947) 72.338,44.737 ; 72.128,44.65 cw(c72.128,44.353) 72.338,44.563 ; 72.628,17.825 cw(c72.628,17.528) 72.838,17.738 ; 72.628,17.825 ccw(c72.628,18.122) 72.838,17.912 ; 72.628,17.825 cw(c72.628,17.528) 72.838,17.738 ; 72.628,17.825 ccw(c72.628,18.122) 72.838,17.912 ; 72.628,17.825 cw(c72.628,17.528) 72.838,17.738 ; 72.628,17.825 ccw(c72.628,18.122) 72.838,17.912 ; 72.628,27.825 cw(c72.628,27.528) 72.838,27.738 ; 72.628,27.825 ccw(c72.628,28.122) 72.838,27.912 ; 72.628,27.825 cw(c72.628,27.528) 72.838,27.738 ; 72.628,27.825 ccw(c72.628,28.122) 72.838,27.912 ; 72.628,27.825 cw(c72.628,27.528) 72.838,27.738 ; 72.628,27.825 ccw(c72.628,28.122) 72.838,27.912 ; 72.668,35.204 ccw(c72.668,35.632) v1@72.97,35.33 ; 72.668,35.204 ccw(c72.668,35.632) v1@72.97,35.33 ; 72.668,35.204 ccw(c72.668,35.632) v1@72.97,35.33 ; 72.768,35.204 cw(c72.768,34.918) v1@72.97,35.12 ; 72.768,35.204 cw(c72.768,34.918) v1@72.97,35.12 ; 72.768,35.204 cw(c72.768,34.918) v1@72.97,35.12 ; 73.168,18.379 ccw(c73.168,18.807) v1@73.47,18.505 ; 73.168,18.379 ccw(c73.168,18.807) v1@73.47,18.505 ; 73.168,18.379 ccw(c73.168,18.807) v1@73.47,18.505 ; 73.268,18.379 cw(c73.268,18.093) v1@73.47,18.295 ; 73.268,18.379 cw(c73.268,18.093) v1@73.47,18.295 ; 73.268,18.379 cw(c73.268,18.093) v1@73.47,18.295 ; v1@-3.253,43.67 cw(c-3.183,43.544) -3.068,43.632 ccw(c-3.183,43.544) v1@-3.253,43.67 ; v1@-1.353,26.245 cw(c-1.283,26.119) -1.168,26.207 ccw(c-1.283,26.119) v1@-1.353,26.245 ; 64.993,38.543 ccw(c65.108,38.631) 65.178,38.505 cw(c65.108,38.631) 64.993,38.543 ; 65.493,21.718 ccw(c65.608,21.806) 65.678,21.68 cw(c65.608,21.806) 65.493,21.718